# Altium PCB MainPCB.PcbDoc
Units mil, origin at the board's own origin, x right, y up, seen from the top; angles counter-clockwise.
Board outline 3160 x 1760 mil, 2 copper layers (Top Layer, Bottom Layer); 20 components, 34 nets, 122 pads, 0 vias.
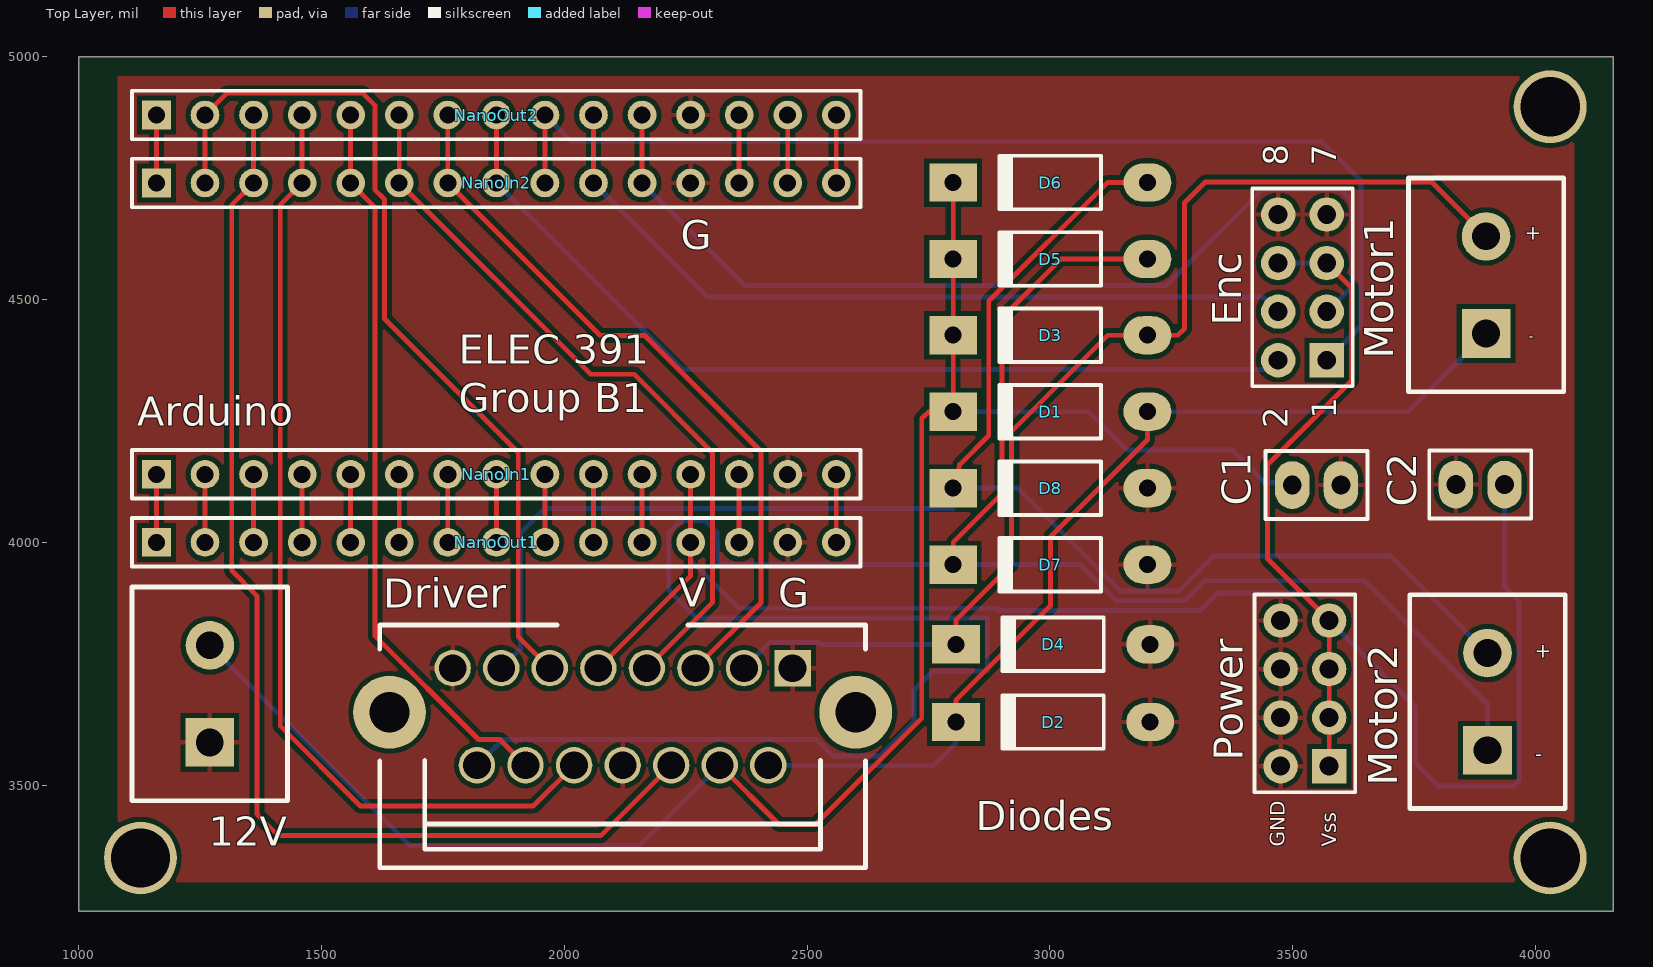
[diagram p0: Top Layer view]
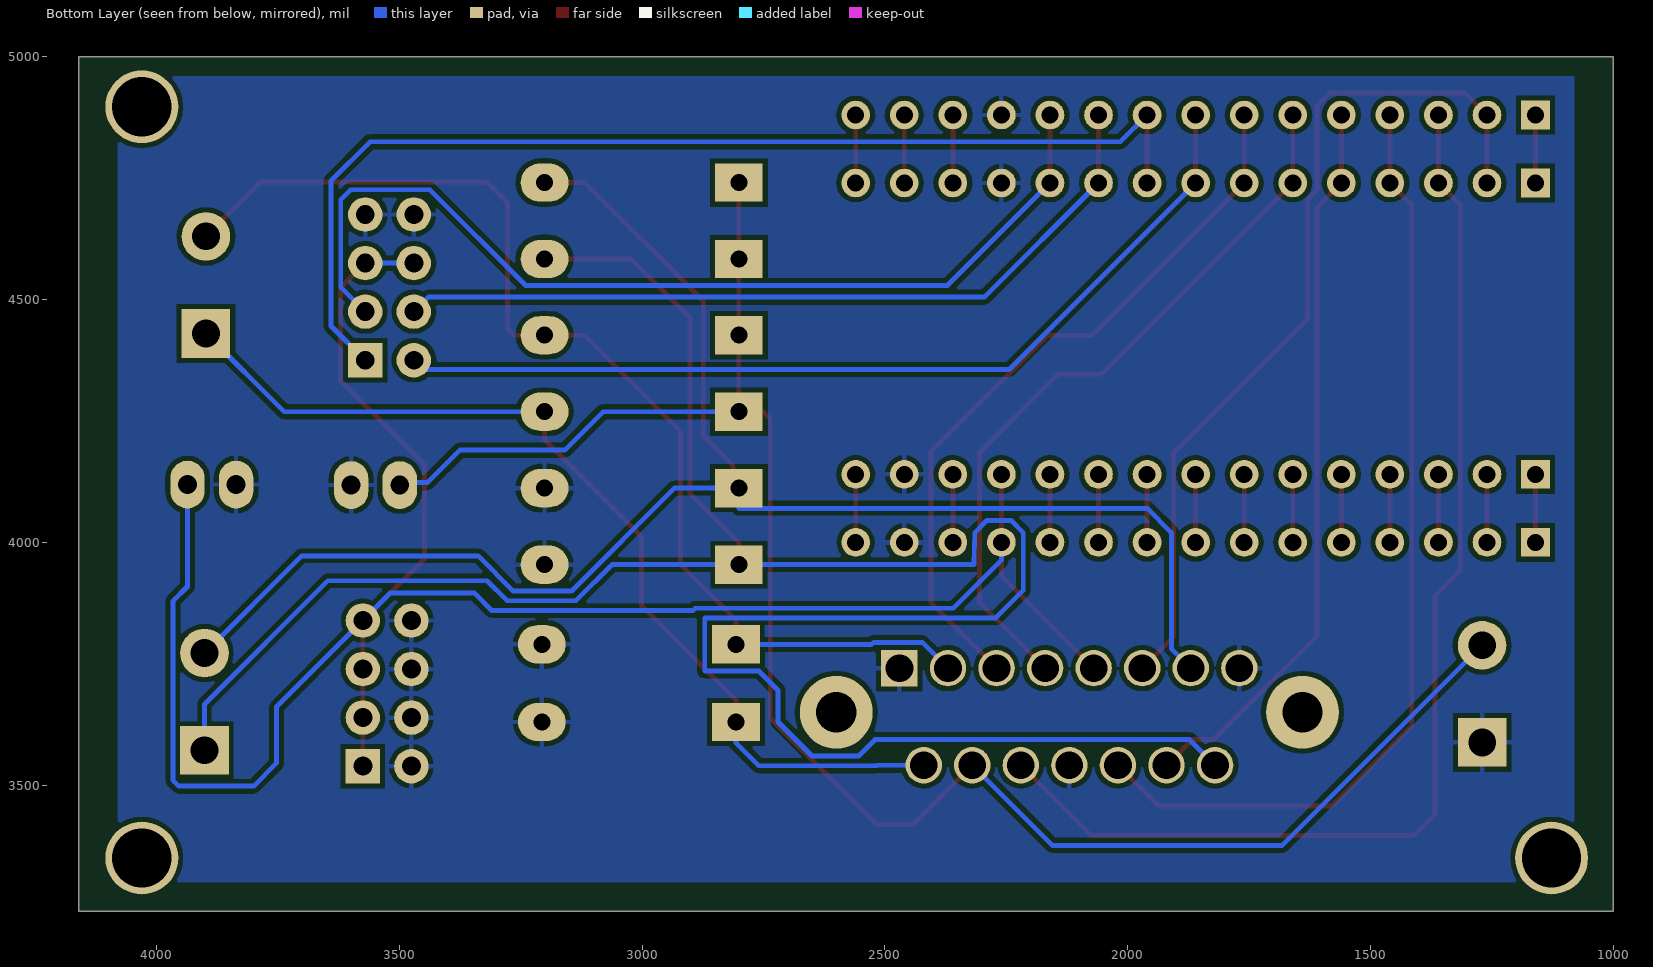
[diagram p1: Bottom Layer view, seen from below]

## Layer stack, top to bottom
Top Solder: solder mask 0.4, Solder Resist, Dk 3.5
Top Layer: signal copper 1.4
Dielectric 1: dielectric 12.6, FR-4, Dk 4.8
Bottom Layer: signal copper 1.4
Bottom Solder: solder mask 0.4, Solder Resist, Dk 3.5

## Board outline
1000,3240 4160,3240 4160,5000 1000,5000

## Design rules (kind name [scope] priority, off if disabled: settings)
AssemblyTestPointUsage [All] p1: valid=2
BoardOutlineClearance [All] p1: gap=10
Clearance [All] p1: gap=7
ComponentClearance [All] p1: gap=0 collisioncheckmode=3 verticalgap=0 showdistances=FALSE
FabricationTestPointUsage [All] p1: valid=2 allowmultiple=FALSE
FabricationTestPointUsage TestPointUsage [All] p2: valid=0 allowmultiple=FALSE
FabricationTestpoint Testpoint [All] p2: side=3 testpointundercomponent=TRUE minsize=40 maxsize=100 preferedsize=60 minholesize=0 maxholesize=40 preferedholesize=32 testpointgrid=1 allowsidetop=TRUE allowsidebottom=TRUE usegrid=TRUE gridtolerance=0.01
Height [All] p1: minheight=0 maxheight=2000 prefheight=500
HoleSize NPTH_withPads [(PadIsPlated = 'False') AND ((HoleDiameter < PadXSize_AllLayers ) OR (HoleDiameter < PadYSize_AllLayers))] p1: absolutevalues=TRUE maxlimit=0 minlimit=0 maxpercent=80.000 minpercent=20.000
HoleSize PadlessThruHole [(PadIsPlated = 'True') And ((HoleDiameter >= PadXSize_AllLayers ) OR (HoleDiameter >= PadYSize_AllLayers))] p2: absolutevalues=TRUE maxlimit=0 minlimit=0 maxpercent=80.000 minpercent=20.000
HoleSize HoleSize20 [HoleSize = 20 AND NOT(PadIsPlated)] p3: absolutevalues=TRUE maxlimit=20 minlimit=20 maxpercent=80.000 minpercent=20.000
HoleSize HoleSize20_p [HoleSize = 17 AND PadIsPlated] p4: absolutevalues=TRUE maxlimit=17 minlimit=17 maxpercent=80.000 minpercent=20.000
HoleSize HoleSize28 [HoleSize = 28 AND NOT(PadIsPlated)] p5: absolutevalues=TRUE maxlimit=28 minlimit=28 maxpercent=80.000 minpercent=20.000
HoleSize HoleSize28_p [HoleSize = 25 AND PadIsPlated] p6: absolutevalues=TRUE maxlimit=25 minlimit=25 maxpercent=80.000 minpercent=20.000
HoleSize HoleSize35 [HoleSize = 35 AND NOT(PadIsPlated)] p7: absolutevalues=TRUE maxlimit=35 minlimit=35 maxpercent=80.000 minpercent=20.000
HoleSize HoleSize35_p [HoleSize = 32 AND PadIsPlated] p8: absolutevalues=TRUE maxlimit=32 minlimit=32 maxpercent=80.000 minpercent=20.000
HoleSize HoleSize38 [HoleSize = 38 AND NOT(PadIsPlated)] p9: absolutevalues=TRUE maxlimit=38 minlimit=38 maxpercent=80.000 minpercent=20.000
HoleSize HoleSize38_p [HoleSize = 35 AND PadIsPlated] p10: absolutevalues=TRUE maxlimit=35 minlimit=35 maxpercent=80.000 minpercent=20.000
HoleSize HoleSize42 [HoleSize = 42 AND NOT(PadIsPlated)] p11: absolutevalues=TRUE maxlimit=42 minlimit=42 maxpercent=80.000 minpercent=20.000
HoleSize HoleSize42_p [HoleSize = 39 AND PadIsPlated] p12: absolutevalues=TRUE maxlimit=39 minlimit=39 maxpercent=80.000 minpercent=20.000
HoleSize HoleSize52 [HoleSize = 52 AND NOT(PadIsPlated)] p13: absolutevalues=TRUE maxlimit=52 minlimit=52 maxpercent=80.000 minpercent=20.000
HoleSize HoleSize52_p [HoleSize = 49 AND PadIsPlated] p14: absolutevalues=TRUE maxlimit=49 minlimit=49 maxpercent=80.000 minpercent=20.000
HoleSize HoleSize60 [HoleSize = 60 AND NOT(PadIsPlated)] p15: absolutevalues=TRUE maxlimit=60 minlimit=60 maxpercent=80.000 minpercent=20.000
HoleSize HoleSize60_p [HoleSize = 57 AND PadIsPlated] p16: absolutevalues=TRUE maxlimit=57 minlimit=57 maxpercent=80.000 minpercent=20.000
HoleSize HoleSize86 [HoleSize = 86 AND NOT(PadIsPlated)] p17: absolutevalues=TRUE maxlimit=86 minlimit=86 maxpercent=80.000 minpercent=20.000
HoleSize HoleSize86_p [HoleSize = 83 AND PadIsPlated] p18: absolutevalues=TRUE maxlimit=83 minlimit=83 maxpercent=80.000 minpercent=20.000
HoleSize HoleSize125 [HoleSize = 125 AND NOT(PadIsPlated)] p19: absolutevalues=TRUE maxlimit=125 minlimit=125 maxpercent=80.000 minpercent=20.000
HoleSize HoleSize125_p [HoleSize = 122 AND PadIsPlated] p20: absolutevalues=TRUE maxlimit=122 minlimit=122 maxpercent=80.000 minpercent=20.000
HoleSize HoleSize152 [HoleSize = 152 AND NOT(PadIsPlated)] p21: absolutevalues=TRUE maxlimit=152 minlimit=152 maxpercent=80.000 minpercent=20.000
HoleSize HoleSize152_p [HoleSize = 149 AND PadIsPlated] p22: absolutevalues=TRUE maxlimit=149 minlimit=149 maxpercent=80.000 minpercent=20.000
HoleSize HoleSizeNULL [HoleSize <> ((20 OR 28 OR 35 OR 38 OR 42 OR 52 OR 60 OR 86 OR 125 OR 152) AND NOT(PadIsPlated))] p23: absolutevalues=TRUE maxlimit=0 minlimit=0 maxpercent=80.000 minpercent=20.000
HoleSize HoleSizeNULL_p [HoleSize <> ((17 OR 25 OR 32 OR 35 OR 39 OR 49 OR 57 OR 83 OR 122 OR 149) AND PadIsPlated)] p24: absolutevalues=TRUE maxlimit=0 minlimit=0 maxpercent=80.000 minpercent=20.000
HoleSize [All] p25: absolutevalues=TRUE maxlimit=152 minlimit=1 maxpercent=80.000 minpercent=20.000
MinimumAnnularRing MinimumAnnularRing_Vias [IsVia] p1: minimumring=5
MinimumAnnularRing [All] p2: minimumring=7
MinimumSolderMaskSliver [All] p1: minsoldermaskwidth=5
PolygonConnect [All] p1: connectstyle=Relief reliefconductorwidth=10 reliefentries=4 polygonreliefangle="90 Angle" airgapwidth=10
RoutingVias RoutingViasSize_17 [HoleSize <= 17] p1: holewidth=17 width=50 viastyle="Through Hole" minholewidth=17 minwidth=27 maxholewidth=17 maxwidth=100
RoutingVias RoutingViasSize_25 [HoleSize <= 25] p2: holewidth=25 width=50 viastyle="Through Hole" minholewidth=25 minwidth=35 maxholewidth=25 maxwidth=100
RoutingVias RoutingViasSize_32 [HoleSize <= 32] p3: holewidth=32 width=50 viastyle="Through Hole" minholewidth=32 minwidth=42 maxholewidth=32 maxwidth=100
RoutingVias [All] p4: holewidth=25 width=50 viastyle="Through Hole" minholewidth=25 minwidth=50 maxholewidth=25 maxwidth=50
SilkToSilkClearance [All] p1: silktosilkclearance=0
SilkToSolderMaskClearance SilkToCopperClearance [All] p1: minsilkscreentomaskgap=10 clearancetoexposedcopper=TRUE
SilkToSolderMaskClearance [All] p2: minsilkscreentomaskgap=5 clearancetoexposedcopper=FALSE
SilkToSolderMaskClearance SilkscreenOverComponentPads [IsPad] p3: minsilkscreentomaskgap=10 clearancetoexposedcopper=TRUE
SolderMaskExpansion [All] p1: expansion=4
Width [All] p1: maxlimit=500 minlimit=7 preferedwidth=10
22 further rules are at their usual default settings.

## Components (designator, comment, footprint, x,y, rotation, side; value= is the part's Value field where it differs from the comment)
12V "Term-Block 2" TERM-BLOCK-5.08MM-2POS 1270,3788 r90 top (schematic designator DriverInput)
C1 "G-Cap" Cap2.54mm_LGE1.0 3549,4118 r0 top
C2 "G-Cap" Cap2.54mm_LGE1.0 3886,4119 r0 top
D1 "1N4148" DO-41_XLGE1.2 3000.73,4269.05 r180 top
D2 "1N4148" DO-41_XLGE1.2 3006.4,3630 r180 top
D3 "1N4148" DO-41_XLGE1.2 3000.73,4426.53 r180 top
D4 "1N4148" DO-41_XLGE1.2 3006.4,3790 r180 top
D5 "1N4148" DO-41_XLGE1.2 3000.73,4583.39 r180 top
D6 "1N4148" DO-41_XLGE1.2 3000.73,4740.87 r180 top
D7 "1N4148" DO-41_XLGE1.2 3000.73,3954.09 r180 top
D8 "1N4148" DO-41_XLGE1.2 3000.73,4111.57 r180 top
Driver "Q-LN298HS" Multiwatt15_V_ELEC391HS 2120,3541 r180 top (schematic designator MotorDriver)
Enc "C-Hdr2x4" HDR2X4_LGE1.0 3520,4525 r90 top (schematic designator EncoderInput)
Motor1 "Term-Block 2" TERM-BLOCK-5.08MM-2POS 3898,4630 r90 top (schematic designator Motor1Out)
Motor2 "Term-Block 2" TERM-BLOCK-5.08MM-2POS 3901,3772 r90 top (schematic designator Motor2Out)
NanoIn1 "Header 15" HDR1X15 1160,4140 r0 top
NanoIn2 "Header 15" HDR1X15 1160,4740 r0 top
NanoOut1 "Header 15" HDR1X15 1160,4000 r0 top
NanoOut2 "Header 15" HDR1X15 1160,4880 r0 top
Power "C-Hdr2x4" HDR2X4_LGE1.0 3525,3689 r90 top

## Footprints (in the part's own frame and the unit in brackets; to place one, negate y for a bottom-side part, rotate by r counter-clockwise, add the part's x,y. Pads: shape width x height; smd on the part's side, far side on the other; paste and mask are expansions set on the pad)
Cap2.54mm_LGE1.0 [mm] "Capacitor, Ceramic, Thru-Hole, Dipped Radial; Body 5.1 x 3.2 mm (WxT) Pin Spacing 2.54 mm (typ)"
  oval 1.8x2.5 hole 0.991: 1(-1.27,0) 2(1.27,0)
  silkscreen extent -2.67,-1.78 2.67,1.78
DO-41_XLGE1.2 [mil] "Diode, Axial; Body 5.2 x 2.7 mm (LxDia. max), Lead Dia. 0.86 mm (max)"
  oval 98.43x78.74 hole 35: 1(-200,0)
  rect 98.43x78.74 hole 35: 2(200,0)
  silkscreen extent -104,-55 108,55, body extent -214,-50 216,50, height 109
HDR1X15 [mm] "Connector; Header; 15 Position"
  rect 1.5x1.5 hole 0.889: 1(0,0)
  round 1.5 hole 0.889: 2(2.54,0) 3(5.08,0) 4(7.62,0) 5(10.16,0) 6(12.7,0) 7(15.24,0) 8(17.78,0) 9(20.32,0) 10(22.86,0) 11(25.4,0) 12(27.94,0) 13(30.48,0) 14(33.02,0) 15(35.56,0)
  silkscreen extent -1.27,-1.27 36.83,1.27
HDR2X4_LGE1.0 [mm] "Connector; Header; 4x2 Position"
  rect 1.8x1.8 hole 0.991: 1(-3.81,-1.27)
  round 1.8 hole 0.991: 2(-3.81,1.27) 3(-1.27,-1.27) 4(-1.27,1.27) 5(1.27,-1.27) 6(1.27,1.27) 7(3.81,-1.27) 8(3.81,1.27)
  silkscreen extent -5.17,-2.63 5.17,2.63, body extent -5.08,-2.51 5.08,2.54, height 8.54
Multiwatt15_V_ELEC391HS [mil]
  rect 75x75 hole 57: 1(-350,-200)
  round 75 hole 57: 2(-300,0) 3(-250,-200) 4(-200,0) 5(-150,-200) 6(-100,0) 7(-50,-200) 8(0,0) 9(50,-200) 10(100,0) 11(150,-200) 12(200,0) 13(250,-200) 14(300,0) 15(350,-200)
  round 150 hole 83: 16(480,-109) 17(-480,-109)
  silkscreen extent -500,-289 500,211, body extent -385,-200 387,157, height 826
TERM-BLOCK-5.08MM-2POS [mil] "TERM BLOCK 5.08MM VERT 2POS PCB"
  rect 100x100 hole 57: 1(-200,0)
  round 100 hole 57: 2(0,0)
  silkscreen extent -320,-160 120,160

## Part data
12V Motor1 Motor2: library part C-Block2, "Terminal-Block 1x2"
C1 C2: "Capacitor (specify value)"
D1 D2 D3 D4 D5 D6 D7 D8: library part T-DiodeRect, "High-speed Diode"
Driver: "LN298 - IC Bridge Driver Par 15Multiwatt"
Enc Power: "Header, 4-Pin, Dual row"
NanoIn1 NanoIn2 NanoOut1 NanoOut2: "Header, 15-Pin"

## Free pads (board coordinates)
  round 150 hole 122: 0(4030,4897) 1(4030,3350) 2(1127,3350)

## Nets (pads, with @x,y where several pads share a name; then routed paths per layer and width w, separated by ;. In a path a pad name is that pad's centre, name@x,y a point inside that pad or via, vN(x,y) a via of type N, cw(c..) or ccw(c..) an arc to the next point about the centre after c; other vN are vias at no path point)
DIREC1A: Driver.5 NanoIn2.7 NanoOut2.7 | length 1516
  Top Layer w10: NanoOut2.7 NanoIn2.7 2074,4426 2166,4426 2405,4187 2405,3876 Driver.5
DIREC1B: Driver.7 NanoIn2.6 NanoOut2.6 | length 1514.8
  Top Layer w10: NanoOut2.6 NanoIn2.6 2054,4346 2144,4346 2305,4185 2305,3876 Driver.7
DIREC2A: Driver.12 NanoIn2.5 NanoOut2.5 | length 1513.7
  Top Layer w10: NanoOut2.5 NanoIn2.5 1610,4690 1610,3807.28 1823.28,3594 1867,3594 Driver.12
DIREC2B: Driver.10 NanoIn2.4 NanoOut2.4 | length 1984.8
  Top Layer w10: NanoOut2.4 NanoIn2.4 1415,4695 1415,3622 1580,3457 1936,3457 Driver.10
ENABLE1: Driver.6 NanoIn2.3 NanoOut2.3 | length 2411.5
  Top Layer w10: NanoOut2.3 NanoIn2.3 1315,4695 1315,3942 1367,3890 1367,3440 1411,3396 2075,3396 Driver.6
ENABLE2: Driver.11 NanoIn2.2 NanoOut2.2 | length 1827.1
  Top Layer w10: NanoIn2.2 NanoOut2.2 1305,4925 1585,4925 1610,4900 1610,4726 1630,4706 1630,4460 1905,4185 1905,3806 Driver.11
ENC1A: Enc.1 NanoIn2.9 NanoOut2.9 | length 2275.3
  Top Layer w10: NanoIn2.9 NanoOut2.9
  Bottom Layer w10: NanoOut2.9 2015,4825 3560,4825 3640.43,4744.57 3640.43,4445.43 Enc.1
ENC1B: Enc.2 NanoIn2.8 NanoOut2.8 | length 1928.1
  Top Layer w10: NanoIn2.8 NanoOut2.8
  Bottom Layer w10: NanoIn2.8 2244,4356 3470,4356 Enc.2
ENC2A: Enc.3 NanoIn2.11 NanoOut2.11 | length 2029.4
  Top Layer w10: NanoIn2.11 NanoOut2.11
  Bottom Layer w10: NanoIn2.11 2371,4529 3240,4529 3437,4726 3600,4726 3620.43,4705.57 3620.43,4525.43 Enc.3
ENC2B: Enc.4 NanoIn2.10 NanoOut2.10 | length 1659.8
  Top Layer w10: NanoIn2.10 NanoOut2.10
  Bottom Layer w10: NanoIn2.10 2295,4505 3440,4505 Enc.4
GND: 12V.1 C1.2 C2.1 D2.1 D4.1 D7.1 D8.1 Driver.1 Driver.8 Driver.15 Enc.7 Enc.8 NanoIn1.14 NanoIn2.12 NanoOut1.14 NanoOut2.12 Power.2 Power.4 Power.6 Power.8
NetNanoIn1_1: NanoIn1.1 NanoOut1.1 | length 140
  Top Layer w10: NanoOut1.1 NanoIn1.1
NetNanoIn1_2: NanoIn1.2 NanoOut1.2 | length 140
  Top Layer w10: NanoOut1.2 NanoIn1.2
NetNanoIn1_3: NanoIn1.3 NanoOut1.3 | length 140
  Top Layer w10: NanoOut1.3 NanoIn1.3
NetNanoIn1_4: NanoIn1.4 NanoOut1.4 | length 140
  Top Layer w10: NanoOut1.4 NanoIn1.4
NetNanoIn1_5: NanoIn1.5 NanoOut1.5 | length 140
  Top Layer w10: NanoOut1.5 NanoIn1.5
NetNanoIn1_6: NanoIn1.6 NanoOut1.6 | length 140
  Top Layer w10: NanoOut1.6 NanoIn1.6
NetNanoIn1_7: NanoIn1.7 NanoOut1.7 | length 140
  Top Layer w10: NanoOut1.7 NanoIn1.7
NetNanoIn1_8: NanoIn1.8 NanoOut1.8 | length 140
  Top Layer w10: NanoOut1.8 NanoIn1.8
NetNanoIn1_9: NanoIn1.9 NanoOut1.9 | length 140
  Top Layer w10: NanoOut1.9 NanoIn1.9
NetNanoIn1_10: NanoIn1.10 NanoOut1.10 | length 140
  Top Layer w10: NanoOut1.10 NanoIn1.10
NetNanoIn1_11: NanoIn1.11 NanoOut1.11 | length 140
  Top Layer w10: NanoOut1.11 NanoIn1.11
NetNanoIn1_13: NanoIn1.13 NanoOut1.13 | length 140
  Top Layer w10: NanoOut1.13 NanoIn1.13
NetNanoIn1_15: NanoIn1.15 NanoOut1.15 | length 140
  Top Layer w10: NanoOut1.15 NanoIn1.15
NetNanoIn2_1: NanoIn2.1 NanoOut2.1 | length 140
  Top Layer w10: NanoIn2.1 NanoOut2.1
NetNanoIn2_13: NanoIn2.13 NanoOut2.13 | length 140
  Top Layer w10: NanoIn2.13 NanoOut2.13
NetNanoIn2_14: NanoIn2.14 NanoOut2.14 | length 140
  Top Layer w10: NanoIn2.14 NanoOut2.14
NetNanoIn2_15: NanoIn2.15 NanoOut2.15 | length 140
  Top Layer w10: NanoIn2.15 NanoOut2.15
V1+: D3.1 D4.2 Driver.3 Motor1.2 | length 2333.8
  Top Layer w10: D4.2 2806.4,3840 2921,3954.6 2921,4228.53 3119,4426.53 D3.1 3263.53,4426.53 3277,4440 3277,4699 3320,4742 3786,4742 Motor1.2
  Bottom Layer w10: Driver.3 2423,3794 2523,3794 2527,3790 D4.2
V1-: D1.1 D2.2 Driver.2 Motor1.1 | length 2016
  Top Layer w10: D2.2 2806.4,3674.4 3001,3869 3001,4011 3200.73,4210.73 D1.1
  Bottom Layer w10: Driver.2 2516.44,3541 2517.44,3540 2760,3540 2806.4,3586.4 D2.2 ; D1.1 3737.05,4269.05 Motor1.1
V2+: D6.1 D8.2 Driver.13 Motor2.2 | length 3389.2
  Top Layer w10: D8.2 2814,4160 2874,4220 2874,4497 3117.87,4740.87 D6.1
  Bottom Layer w10: Driver.13 1910,3781 1910,4020 1960,4070 2800.73,4070 D8.2 2933.43,4111.57 3145.28,3899.72 3265,3899.72 3337.28,3972 3701,3972 Motor2.2
V2-: D5.1 D7.2 Driver.14 Motor2.1 | length 5024.2
  Top Layer w10: D7.2 2800.73,4000 2901,4100.27 2901,4462 3022.38,4583.38 D5.1
  Bottom Layer w10: Driver.14 1873,3594 2520,3594 2554,3560 2650,3560 2720,3630 2720,3695 2760,3735 2871,3735 2871,3844.37 2271.63,3844.37 2215,3901 2215,4020 2240,4045 2290,4045 2315,4020 2316.38,3954.09 D7.2 3061.91,3954.09 3136.28,3879.72 3278,3879.72 3319.28,3921 3647,3921 3901,3667 Motor2.1
VS: 12V.2 C1.1 D1.2 D3.2 D5.2 D6.2 Driver.4 | length 3769.4
  Top Layer w10: Driver.4 2442,3419 2517,3419 2736,3638 2736,4255.05 2750,4269.05 D1.2 D3.2 D5.2 D6.2
  Bottom Layer w10: 12V.2 1682,3376 2155,3376 Driver.4 ; D1.2 3080,4269.05 3159.05,4190 3375,4190 3442,4123 3499,4123 C1.1
VSS: C2.2 Driver.9 Enc.5 Enc.6 NanoIn1.12 NanoOut1.12 Power.1 Power.3 Power.5 Power.7 | length 4419
  Top Layer w10: Driver.9 2260,3931 NanoOut1.12 NanoIn1.12 ; Enc.5 3621,4524 3621,4333 3448,4160 3448,3966 Power.7 Power.5 Power.3 Power.1
  Bottom Layer w10: NanoOut1.12 2260,3963.11 2358.74,3864.37 2890.62,3864.37 2895.27,3859.72 3309.27,3859.72 3345.55,3896 3518,3896 Power.7 3753,3661 3753,3545 3800,3498 3954,3498 3966,3510 3966,3879 3936,3909 C2.2 ; Enc.6 Enc.5
pads on no net: Driver.16 Driver.17

## Polygon pours and split planes (outlines as drawn)
GND on Top Layer "Ground" (solid, pour order 0): 1080,4960 4080,4960 4080,3300 1080,3300
GND on Bottom Layer "Ground" (solid, pour order 2): 1080,4960 4080,4960 4080,3300 1080,3300

## Silkscreen, mask and mechanical layers (free items; w line width, h text height)
Top Overlay:
  text "+" at 3978,4623 h30
  text "G" at 2240.16,4603.35 h60
  text "-" at 3986,4415 h20
  text "ELEC 391" at 1782.56,4368.11 h60
  text "Group B1" at 1782.56,4268.11 h60
  text "Arduino" at 1120,4240 h60
  text "V" at 2235.24,3867.13 h60
  text "G" at 2440.94,3866.14 h60
  text "+" at 3998,3762 h30
  text "-" at 3999,3550 h30
  text "Diodes" at 2847.6,3407.03 h60
Mechanical 1:
  the board outline again, w10

## Text inside footprints (layer, text, board x,y; h text height)
Enc: Top Overlay "8" at 3490,4775 h50 r90; Top Overlay "7" at 3590,4775 h50 r90; Top Overlay "1" at 3590,4255 h50 r90; Top Overlay "2" at 3490,4235 h50 r90
Power: Top Overlay "GND" at 3484,3373 h30 r90; Top Overlay "Vss" at 3590,3373 h30 r90